# Altium PCB mainPCBV2.PcbDoc
Units mm, origin at the board's own origin, x right, y up, seen from the top; angles counter-clockwise.
Board outline 31.25 x 37.99 mm, 2 copper layers (Top Layer, Bottom Layer); 23 components, 32 nets, 129 pads, 144 vias.
Unrouted connection lines stored in the file: 6.
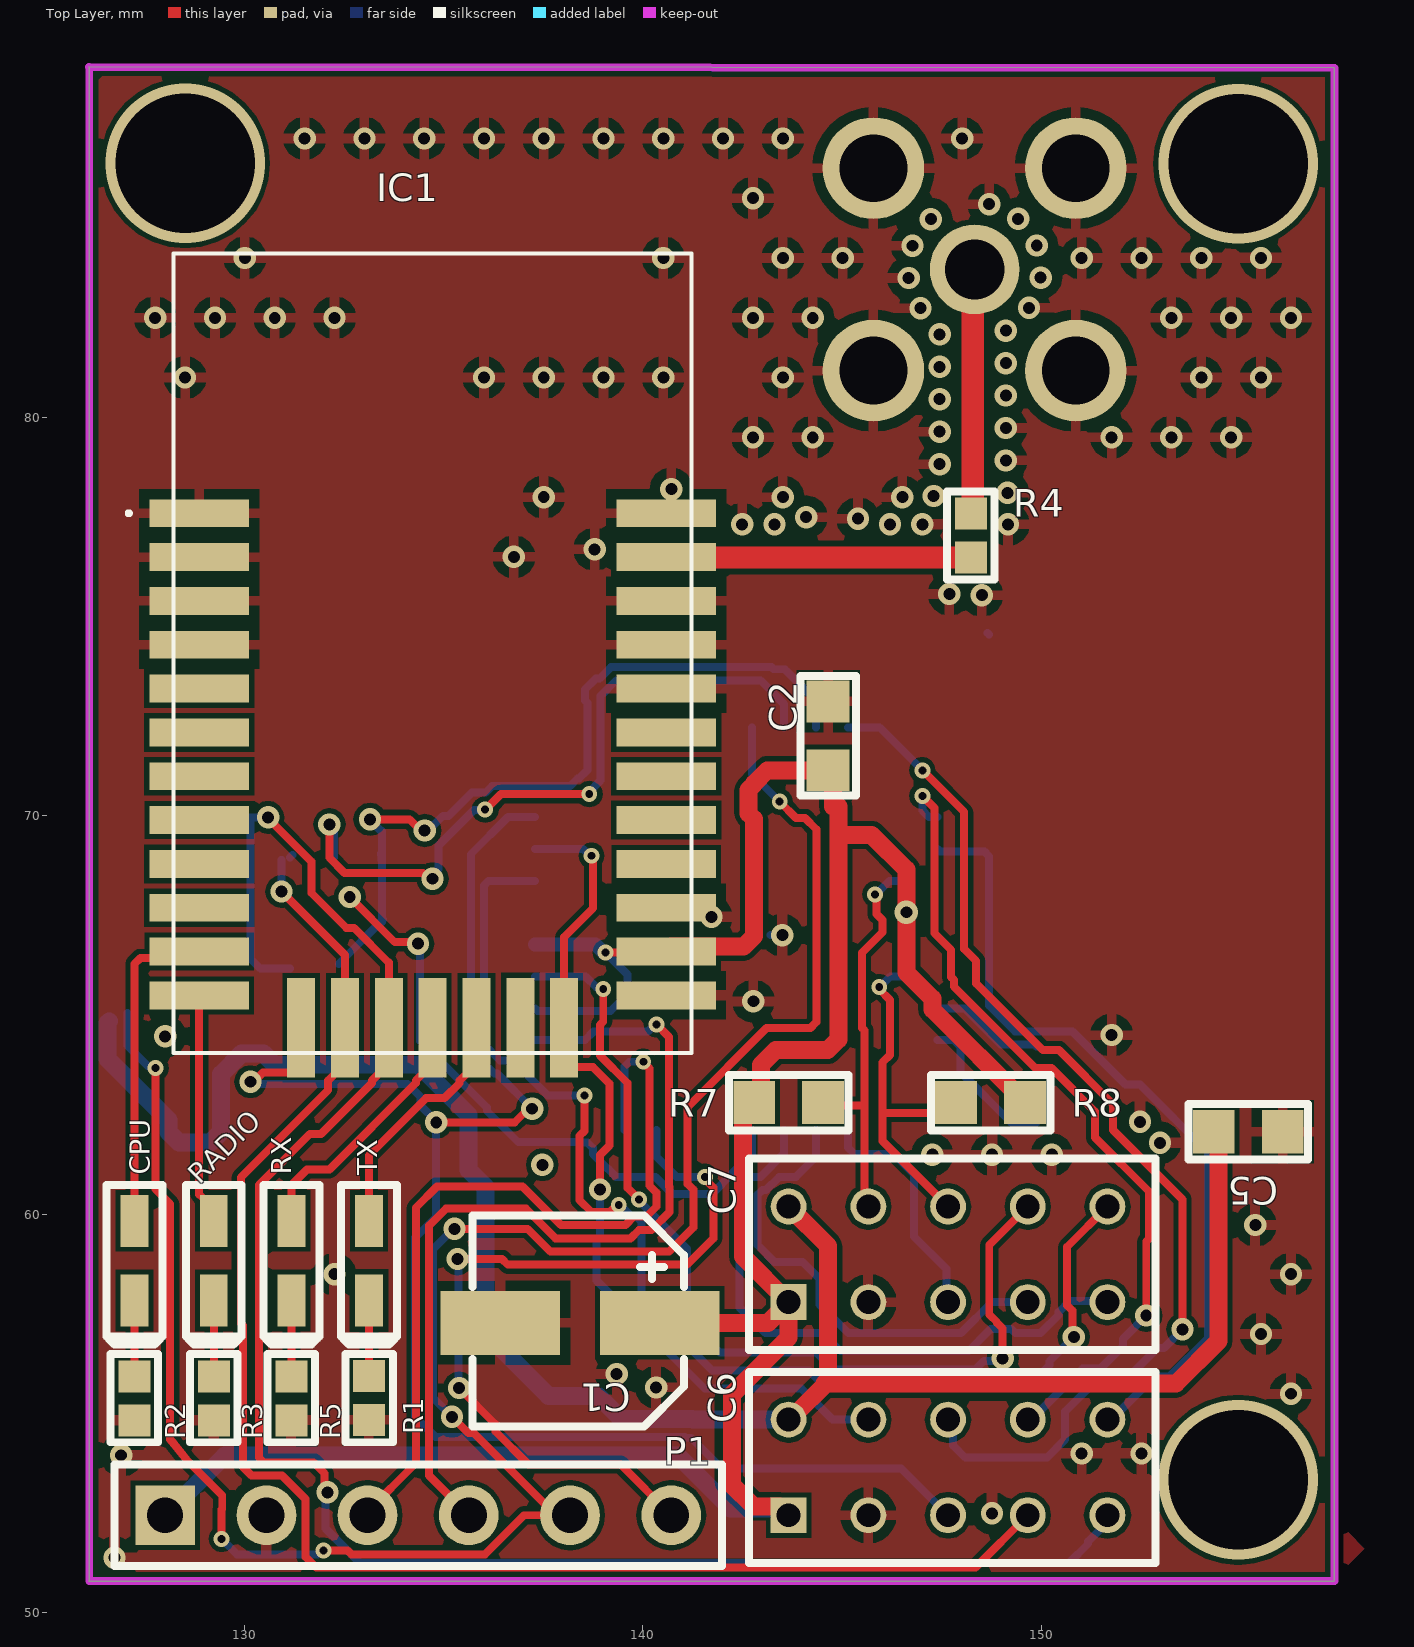
[diagram p0: Top Layer view]
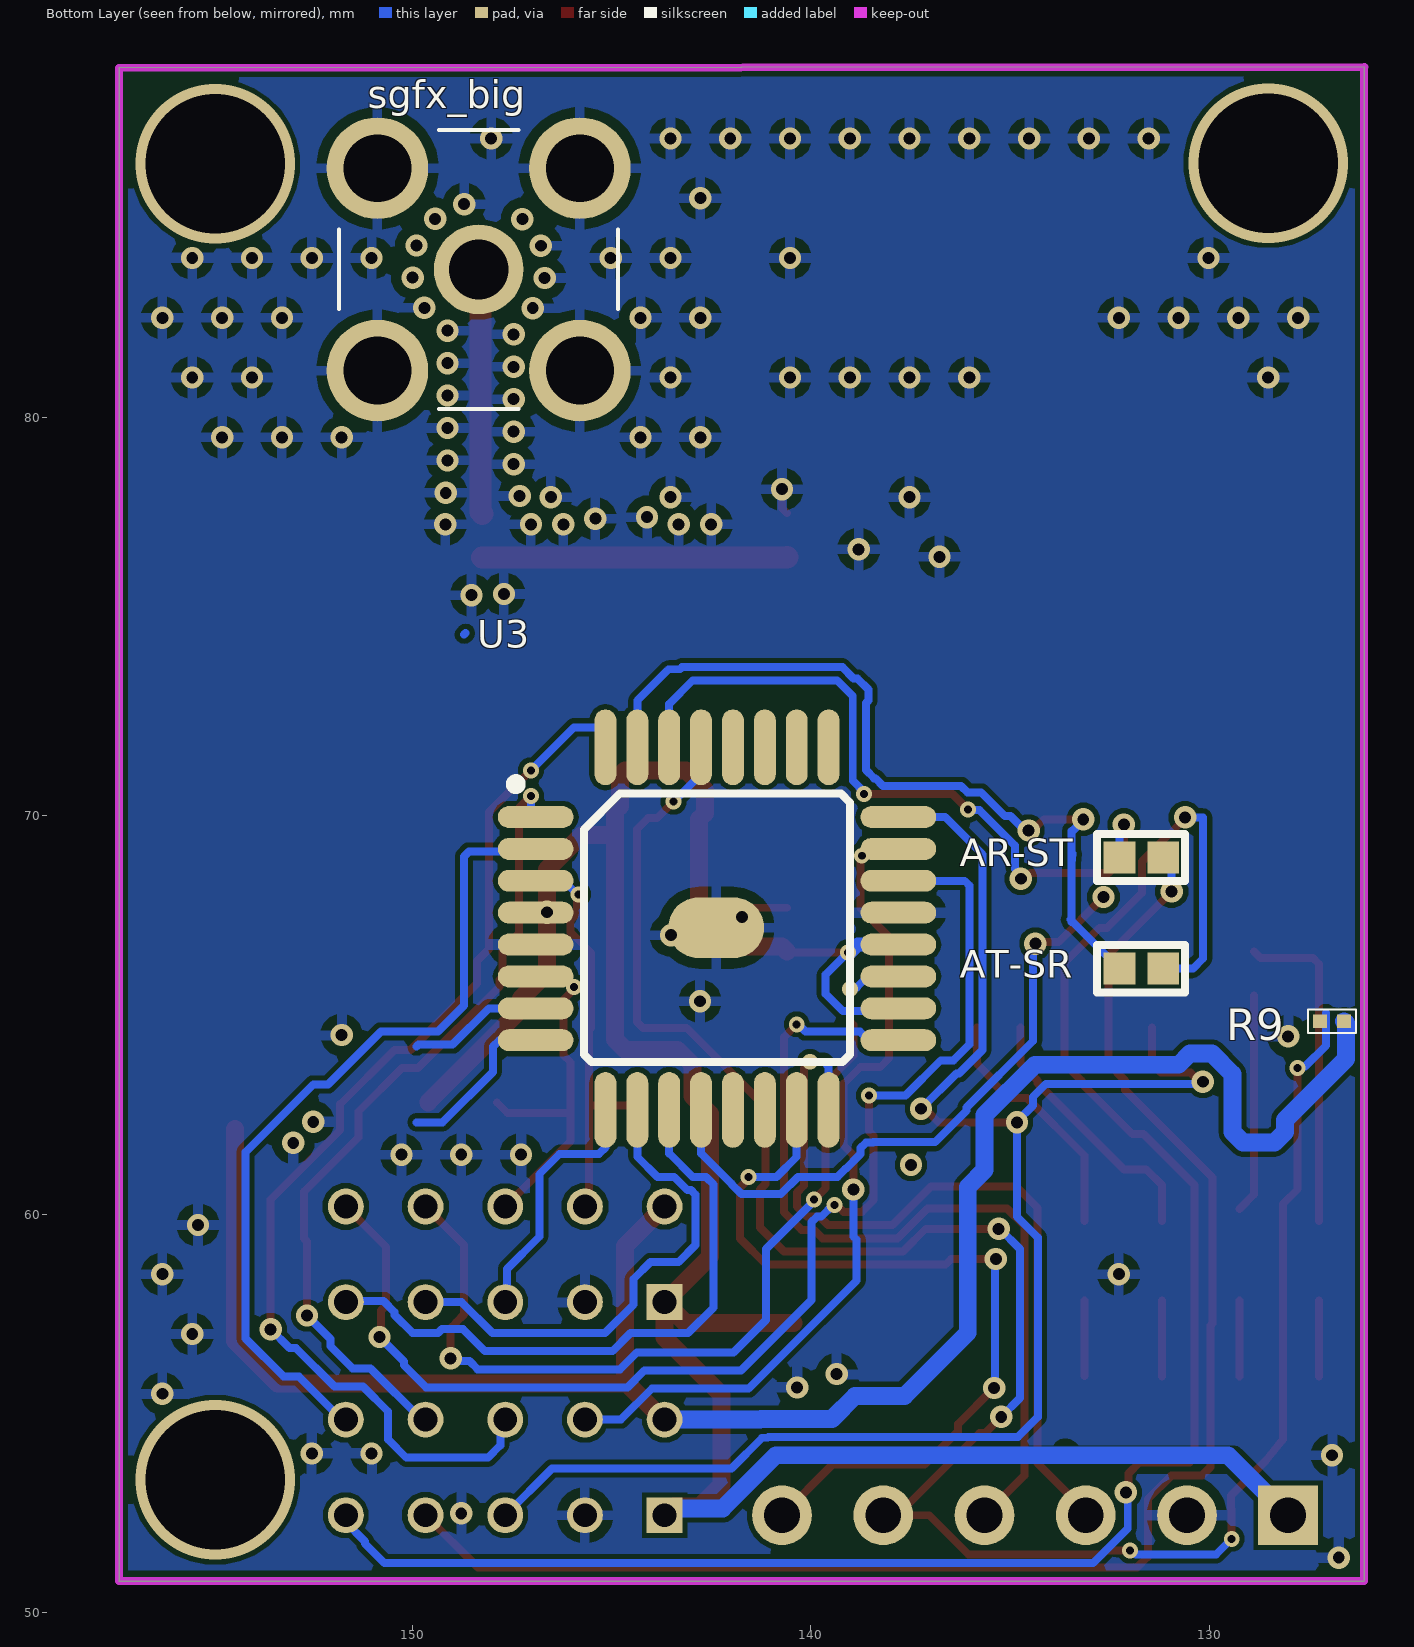
[diagram p1: Bottom Layer view, seen from below]
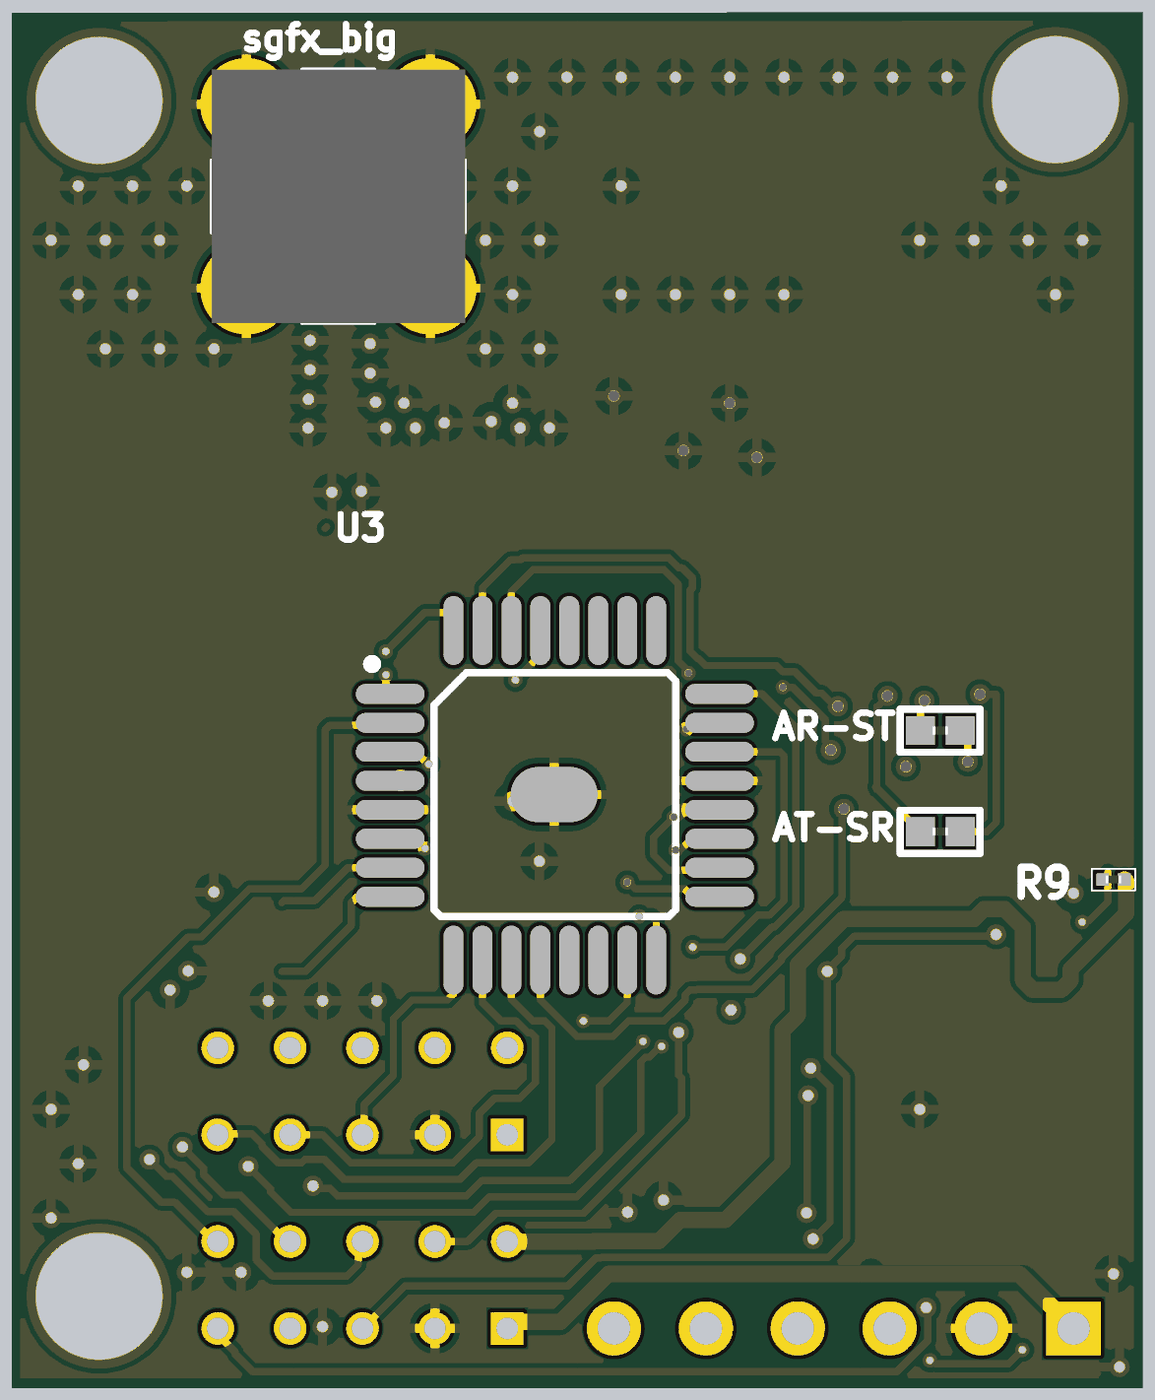
[diagram p2: 3D render of the assembled board from below, using the file's embedded part models]

## Layer stack, top to bottom
Top Solder: solder mask 0.0102, Solder Resist, Dk 3.8
Top Layer: signal copper 0.0356
Dielectric 1: dielectric 0.32, FR-4, Dk 4.5
Bottom Layer: signal copper 0.0356
Bottom Solder: solder mask 0.0102, Solder Resist, Dk 3.8

## Board outline
126.111,50.8 126.111,88.773 126.104,88.794 157.353,88.773 157.353,50.8

## Design rules (kind name [scope] priority, off if disabled: settings)
Clearance Clearance_1 [OnMid vs OnMid] p1: gap=0.13 ignorepadtopadclearanceinfootprint=TRUE
Clearance Clearance_2 [(ExistsOnLayer('Top Layer') Or ExistsOnLayer('Bottom Layer')) vs (ExistsOnLayer('Top Layer') Or ExistsOnLayer('Bottom Layer'))] p2: gap=0.13 ignorepadtopadclearanceinfootprint=TRUE
Clearance [All] p3: gap=0.13 ignorepadtopadclearanceinfootprint=TRUE
MinimumAnnularRing [All] p1: minimumring=0.13
PolygonConnect [All] p1: connectstyle=Relief reliefconductorwidth=0.254 reliefentries=4 polygonreliefangle="90 Angle" airgapwidth=0.254
RoutingVias [All] p1: holewidth=0.711 width=1.27 viastyle="Through Hole" minholewidth=0.711 minwidth=1.27 maxholewidth=0.711 maxwidth=1.27
SolderMaskExpansion SolderMaskExpansion_1 [IsVia] p1: expansion=0.102 istentingtop=TRUE
SolderMaskExpansion [All] p2: expansion=0.102 istentingtop=FALSE
SupplyNets "Schematic Supply Nets_2" [InNet('3v3')] p1: voltage=0.000
SupplyNets "Schematic Supply Nets_1" [InNet('GND')] p2: voltage=0.000
Width [All] p1: maxlimit=0.254 minlimit=0.254 preferedwidth=0.254
30 further rules are at their usual default settings.

## Components (designator, comment, footprint, x,y, rotation, side; value= is the part's Value field where it differs from the comment)
AR-ST "Res" RES_SMD_0402#1 131.699,68.961 r0 bottom value=0
AT-SR "Res" RES_SMD_0402#1 131.699,66.167 r0 bottom value=0
C1 "Cap" "Capacitor E SMT" 138.43,57.277 r0 top value=10uF
C2 "CAP_SMT_0603" SMT_CAP_0603 144.653,72.009 r90 top
C5 "CAP_SMT_0603" SMT_CAP_0603 155.194,62.074 r0 top
C6 "2mmHeader" 2MMHEADER5X2 143.662,52.451 r90 top
C7 "2mmHeader" 2MMHEADER5X2 143.662,57.798 r90 top
CPU "LED" Led0805 127.247,58.838 r270 top
IC1 "WSSFM10R1AT" WSSFM10R1AT 134.504,71.545 r0 top
P1 "Header 6" HDR1X6 128.016,52.451 r0 top
R1 "Res" RES_SMD_0402#1 133.128,55.393 r270 top value=330
R2 "Res" RES_SMD_0402#1 127.247,55.383 r90 top value=330
R3 "Res" RES_SMD_0402#1 129.24,55.383 r90 top value=330
R4 "Res" RES_SMD_0402#1 148.235,77.035 r90 top value=0
R5 "Res" RES_SMD_0402#1 131.184,55.383 r90 top value=330
R7 "Res" SMT_CAP_0603 143.662,62.804 r0 top value=1k
R8 "Res" SMT_CAP_0603 148.729,62.804 r180 top value=1k
R9 "Res" RES_SMD_0402#2 126.913,64.847 r0 bottom value=10k
RADIO "LED" Led0805 129.236,58.838 r270 top
RX "LED" Led0805 131.184,58.838 r270 top
sgfx_big "132134" 132134 148.329,83.714 r180 bottom
TX "LED" Led0805 133.131,58.838 r270 top
U3 "ATMEGA328PB-MU" ATMEGA328TQFP 142.347,67.172 r180 bottom

## Footprints (in the part's own frame and the unit in brackets; to place one, negate y for a bottom-side part, rotate by r counter-clockwise, add the part's x,y. Pads: shape width x height; smd on the part's side, far side on the other; paste and mask are expansions set on the pad)
2MMHEADER5X2 [mm]
  rect 0.9x0.9 hole 0.6: 1(0,0)
  round 0.9 hole 0.6: 2(2.4,0) 3(0,-2) 4(2.4,-2) 5(0,-4) 6(2.4,-4) 7(0,-6) 8(2.4,-6) 9(0,-8) 10(2.4,-8)
  silkscreen extent -1.2,-9.2 3.6,1
132134 [mm]
  round 2.25 hole 1.5: 1(0,0)
  round 2.55 hole 1.7: 2(2.54,2.54) 3(2.54,-2.54) 4(-2.54,-2.54) 5(-2.54,2.54)
  silkscreen extent -3.5,-3.5 3.5,3.5, body extent -3.5,-3.5 3.5,3.5, height 9.53
ATMEGA328TQFP [mm] "TQFP, 32-Leads, Body 11.15x11.15mm, Pitch 0.80mm, IPC Medium Density"
  oval 1.9x0.55 smd: 1(-4.55,2.8) 2(-4.55,2) 3(-4.55,1.2) 4(-4.55,0.4) 5(-4.55,-0.4) 6(-4.55,-1.2) 7(-4.55,-2) 8(-4.55,-2.8) 17(4.55,-2.8) 18(4.55,-2) 19(4.55,-1.2) 20(4.55,-0.4) 21(4.55,0.4) 22(4.55,1.2) 23(4.55,2) 24(4.55,2.8)
  oval 0.55x1.9 smd: 9(-2.8,-4.55) 10(-2,-4.55) 11(-1.2,-4.55) 12(-0.4,-4.55) 13(0.4,-4.55) 14(1.2,-4.55) 15(2,-4.55) 16(2.8,-4.55) 25(2.8,4.55) 26(2,4.55) 27(1.2,4.55) 28(0.4,4.55) 29(-0.4,4.55) 30(-1.2,4.55) 31(-2,4.55) 32(-2.8,4.55)
  oval 2.4x1.524 smd: 33(-0.02,0.02)
  silkscreen extent -5.18,-3.35 3.34,3.75, body extent -3.5,-3.5 3.5,3.5, height 1.2
"Capacitor E SMT" [mm]
  rect 3x1.6 smd: 1(-2,0) 2(2,0)
  silkscreen extent -2.7,-2.6 2.6,2.7
HDR1X6 [mm] "Connector; Header; 6 Position"
  rect 1.5x1.5 hole 0.9: 1(0,0)
  round 1.5 hole 0.9: 2(2.54,0) 3(5.08,0) 4(7.62,0) 5(10.16,0) 6(12.7,0)
  silkscreen extent -1.27,-1.27 13.97,1.27
Led0805 [mm]
  rect 1.3x0.7 smd: 1(-1,0) 2(1,0)
  silkscreen extent -1.9,-0.7 2.1,0.7
RES_SMD_0402#1 [mm]
  rect 0.8x0.8 smd: 1(-0.55,0) 2(0.55,0)
  silkscreen extent -1.1,-0.59 1.11,0.6, body extent -0.21,-0.11 0.21,0.11, height 0.13
RES_SMD_0402#2 [mm] "Chip Resistor, 2-Leads, Body 0.40x0.20mm, IPC Low Density"
  rect 0.35x0.35 smd: 1(-0.3,0) 2(0.3,0)
  silkscreen extent -0.6,-0.3 0.6,0.3, body extent -0.21,-0.11 0.21,0.11, height 0.13
SMT_CAP_0603 [mm]
  rect 1.05x1.08 smd: 1(-0.865,0) 2(0.865,0)
  silkscreen extent -1.5,-0.7 1.5,0.7
WSSFM10R1AT [mm]
  rect 2.5x0.7 smd: 1(-5.635,6.05) 2(-5.635,4.95) 3(-5.635,3.85) 4(-5.635,2.75) 5(-5.635,1.65) 6(-5.635,0.55) 7(-5.635,-0.55) 8(-5.635,-1.65) 9(-5.635,-2.75) 10(-5.635,-3.85) 11(-5.635,-4.95) 12(-5.635,-6.05) 20(6.085,-6.05) 21(6.085,-4.95) 22(6.085,-3.85) 23(6.085,-2.75) 24(6.085,-1.65) 25(6.085,-0.55) 26(6.085,0.55) 27(6.085,1.65) 28(6.085,2.75) 29(6.085,3.85) 30(6.085,4.95) 31(6.085,6.05)
  rect 0.7x2.5 smd: 13(-3.075,-6.86) 14(-1.975,-6.86) 15(-0.875,-6.86) 16(0.225,-6.86) 17(1.325,-6.86) 18(2.425,-6.86) 19(3.525,-6.86)
  silkscreen extent -7.45,-7.5 6.73,12.57, body extent -6.27,-7.5 6.73,7.5, height 2.1

## Part data
AR-ST AT-SR R7 R8: library part RES_SMD, "Resistor", Manufacturer="Generic Components", Class I=Passive, Class II=Resistor, Published=8-Jun-2000, Publisher="Altium Limited", Revision="July-2002: Re-released for DXP Platform."
C1: library part "Cap E SMT", "Capacitor Electrolitico", Manufacturer="Generic Components", Class I=Passive, Class II=Capacitor, Published=23-Sep-2002, Publisher="Altium Limited"
CPU RADIO RX TX: Manufacturer="Generic Components", Class I=Optoelectronic, Class II=LED, Published=8-Jun-2000, Publisher="Altium Limited", Revision="July-2002: Re-released for DXP Platform."
IC1: "Integrated Circuit", Manufacturer_Name=Wisol, Datasheet Link=http://www.erikrasmussen.dk/wisol_wssfm10r1at.pdf, Height=2mm, Manufacturer_Part_Number=WSSFM10R1AT
P1: "Header, 6-Pin", LatestRevisionDate=17-Jul-2002, LatestRevisionNote="Re-released for DXP Platform.", Publisher="Altium Limited"
R1 R2 R3 R4 R5 R9: library part RES_SMT_1206, "Resistor", Manufacturer="Generic Components", Class I=Passive, Class II=Resistor, Published=8-Jun-2000, Publisher="Altium Limited", Revision="July-2002: Re-released for DXP Platform."
sgfx_big: "Connector", Manufacturer_Name="Amphenol RF", Mouser Part Number=523-132134, Allied_Number=70031837, Allied Price/Stock=https://www.alliedelec.com/amphenolrf-132134/70031837/, Datasheet Link=https://www.amphenolrf.com/downloads/dl/file/id/2187/product/2843/132134_customer_drawing.pdf, Height=9.53mm, Manufacturer_Part_Number=132134, Mouser Price/Stock=https://www.mouser.com/Search/Refine.aspx?Keyword=523-132134
U3: "AVR 32KBytes Flash, 1KBytes EEPROM, 2KBytes RAM, w - 20MHZ, QFN/MFL, IND TEMP, GREEN 5 V/ DFN/QFN _M_", Package="VFQFN-32 Microchip", Digi-Key_Part_Number=ATMEGA328PB-MU-ND, Digi-Key_Purchase_URL=https://www.digikey.com/product-detail/en/microchip-technology/ATMEGA328PB-MU/ATMEGA328PB-MU-ND/5638814?utm_source=snapeda&utm_medium=aggregator&utm_campaign=symbol, MF=Microchip, MP=ATMEGA328PB-MU, SnapEDA_Link=https://www.snapeda.com/parts/ATMEGA328PB-MU/Microchip/view-part/?ref=snap

## Via types
v1: diameter 0.56, hole 0.3, Top Layer to Bottom Layer, tented both sides, 121 vias
v2: diameter 0.4, hole 0.2, Top Layer to Bottom Layer, tented both sides, 19 vias
v3: diameter 4, hole 3.5, Top Layer to Bottom Layer, tented both sides, 3 vias
v4: diameter 0.6, hole 0.3, Top Layer to Bottom Layer, tented both sides, 1 vias

## Nets (pads, with @x,y where several pads share a name; then routed paths per layer and width w, separated by ;. In a path a pad name is that pad's centre, name@x,y a point inside that pad or via, vN(x,y) a via of type N, cw(c..) or ccw(c..) an arc to the next point about the centre after c; other vN are vias at no path point)
3v3: C1.2 C2.1 C5.1 C6.1 C6.2 C7.1 C7.2 IC1.21 P1.1 R7.1 R8.1 R9.1 U3.4 U3.18 U3.20 | length 117
  Top Layer w0.2: v2(139.065,66.572) 140.566,66.572 IC1.21
  Top Layer w0.45: C1.2 143.141,57.277 C7.1 ; IC1.21 140.714,66.72 142.533,66.72 142.797,66.984 142.797,69.918 142.65,70.065 142.65,70.649 142.797,70.796 142.797,70.817 143.124,71.144 C2.1 144.777,71.02 144.777,70.234 ; C6.1 143.437,52.676 142.777,52.676 142.24,53.213 142.24,55.485 143.662,56.906 C7.1 ; C7.2 144.653,59.207 144.653,55.842 144.564,55.753 153.377,55.753 154.446,56.823 C5.1@154.446,62.139 ; C6.2@143.764,54.922 144.666,55.824 ; 144.907,70.231 144.907,69.551 ; R8.1 149.594,62.819 147.266,65.147 147.266,65.419 146.613,66.072 v4(146.613,67.582) 146.613,68.651 145.742,69.523 144.935,69.523 144.907,69.551 ; C7.1 142.519,58.941 142.519,62.526 142.966,62.974 142.966,63.754 143.337,64.125 144.643,64.125 144.907,64.389 144.907,69.551
  Bottom Layer w0.2: U3.18@137.297,65.172 137.364,65.105 138.535,65.105 138.54,65.1 139.187,65.1 139.619,65.532 139.619,66.017 v2(139.065,66.572) v2@139.011,66.572
  Bottom Layer w0.35: U3.20@137.297,66.772 138.81,66.772 v2@139.011,66.572
  Bottom Layer w0.45: R9.1 126.566,64.8 126.566,63.903 128.096,62.373 128.096,62.065 128.36,61.801 129.149,61.801 129.413,62.065 129.413,63.518 129.929,64.034 130.483,64.034 130.762,63.756 134.372,63.756 135.633,62.495 135.633,61.111 136.055,60.689 136.055,57.031 137.638,55.448 138.879,55.448 139.46,54.867 141.249,54.867 141.265,54.851 C6.2 ; P1.1 129.522,53.957 140.872,53.957 142.204,52.625 143.487,52.625 C6.1
ADC6: C7.8 U3.19 | length 24
  Top Layer w0.2: v2(139.009,65.661) 139.009,64.839 138.926,64.756 138.926,63.988 139.621,63.292 139.621,60.663 v2(139.911,60.373) ; v1(149.032,56.388) 149.032,57.139 148.893,57.279 148.893,57.291 148.695,57.49 148.695,59.231 C7.8
  Bottom Layer w0.2: U3.19@137.297,65.972 138.567,65.972 138.84,65.699 138.971,65.699 v2(139.009,65.661) ; v2(139.911,60.373) 139.911,60.339 141.117,59.132 141.117,57.353 141.934,56.536 144.359,56.536 144.782,56.113 148.352,56.113 148.559,56.319 148.964,56.319 v1(149.032,56.388)
ADC7: C7.10 U3.22 | length 31.1
  Top Layer w0.2: v2(138.538,62.982) 138.538,62.095 138.416,61.973 138.416,60.356 138.708,60.064 139.17,60.064 139.358,60.253 v2@139.358,60.278 ; v1(150.818,56.926) 150.779,56.965 150.779,57.587 150.652,57.714 150.652,59.188 C7.10
  Bottom Layer w0.2: U3.22@137.297,68.372 136.133,68.372 136.016,68.255 136.016,64.265 136.413,63.867 136.732,63.867 137.618,62.982 v2(138.538,62.982) ; v2(139.398,60.238) 139.437,60.238 139.732,59.943 139.839,59.943 139.974,59.808 ; 139.927,59.856 139.974,59.808 ; v1(150.818,56.926) 150.202,56.31 150.202,56.216 149.645,55.659 144.594,55.659 144.171,56.082 141.746,56.082 139.974,57.854 139.974,59.808
D2: C6.6 U3.32 | length 27.6
  Top Layer w0.2: v2(147.017,71.144) 148.066,70.095 148.066,66.662 148.367,66.361 148.367,65.797 150.039,64.125 150.443,64.125 151.802,62.765 151.802,62.117 153.547,60.373 v1(153.547,57.117)
  Bottom Layer w0.2: U3.32@145.147,72.222 145.938,72.222 v2(147.017,71.144) ; C6.6 147.785,54.727 147.785,54.206 148.095,53.896 150.144,53.896 150.599,54.351 150.599,55.05 151.228,55.68 151.948,55.68 152.917,56.648 153.079,56.648 v1(153.547,57.117)
D3: C6.8 U3.1 | length 20.6
  Top Layer w0.2: v2(147.017,70.5) 147.318,70.198 147.318,67.058 147.736,66.64 147.736,65.959 147.808,65.887 147.808,65.714 149.851,63.671 150.255,63.671 151.348,62.577 151.348,61.929 152.708,60.57 152.708,59.396 152.635,59.323 v1(152.635,57.462)
  Bottom Layer w0.2: v2(147.017,70.5) 147.017,70.134 147.178,69.972 U3.1@147.397,69.972 ; C6.8 149.757,54.851 151.04,56.134 151.49,56.134 152.048,56.693 152.048,56.875 v1(152.635,57.462)
D4: C6.10 U3.2 | length 20.2
  Bottom Layer w0.2: U3.2@147.397,69.172 147.464,69.105 148.573,69.105 148.693,68.985 148.693,65.245 149.347,64.591 150.782,64.591 152.112,63.261 152.478,63.261 154.178,61.561 154.178,56.89 153.221,55.932 152.843,55.932 151.761,54.851 C6.10
D5: C7.5 U3.9 | length 5.9
  Bottom Layer w0.2: U3.9@145.147,62.122 145.147,61.682 145.309,61.52 146.295,61.52 146.807,61.007 146.807,59.441 147.619,58.629 147.619,57.841 C7.5
D6: C7.7 U3.10 | length 12.2
  Bottom Layer w0.2: U3.10@144.347,62.122 144.347,61.447 143.842,60.942 143.423,60.942 143.093,60.612 143.002,60.612 142.885,60.495 142.885,59.234 143.31,58.809 144.013,58.809 144.439,58.383 144.439,57.741 145.159,57.021 147.983,57.021 148.76,57.798 C7.7
D7: C7.9 U3.11 | length 15.5
  Bottom Layer w0.2: U3.11@143.547,62.122 143.547,61.533 142.956,60.942 142.623,60.942 142.431,60.75 142.431,57.667 143.076,57.021 144.517,57.021 144.971,56.567 148.171,56.567 148.727,57.122 149.248,57.122 149.349,57.021 149.983,57.021 150.439,57.476 150.439,57.548 150.716,57.825 151.634,57.825 C7.9
deepSLP: C6.5 IC1.13 U3.24 | length 41.2
  Top Layer w0.2: v1(130.156,63.329) 130.239,63.329 130.471,63.562 131.206,63.562 131.429,63.785 IC1.13 ; v1(134.818,62.311) 136.788,62.311 137.129,62.652 v1(137.226,62.652)
  Bottom Layer w0.2: v1(130.156,63.329) 130.208,63.278 134.094,63.278 134.421,62.95 134.421,62.735 134.818,62.338 v1(134.818,62.311) 134.818,59.944 134.289,59.415 134.289,54.921 134.798,54.412 141.06,54.412 141.076,54.396 141.213,54.396 141.983,53.626 146.487,53.626 C6.5 ; v1(137.226,62.652) 136.341,63.537 136.276,63.537 135.686,64.128 135.686,69.036 136.622,69.972 U3.24@137.297,69.972
GND: C1.1 C2.2 C5.2 C6.3 C7.3 IC1.1 IC1.2 IC1.3 IC1.4 IC1.20 IC1.22 IC1.27 IC1.28 IC1.29 IC1.31 P1.2 R1.2 R2.1 R3.1 R5.1 sgfx_big.2 sgfx_big.3 sgfx_big.4 sgfx_big.5 U3.5 U3.21 U3.33 | length 2.2
  Top Layer w0.2: IC1.22 141.496,67.695 v1(141.723,67.468) ; IC1.31 140.716,77.722 v1(140.716,78.199)
  Bottom Layer w0.2: U3.33@143.207,67.007 v1(143.502,67.007)
  other v1: 126.746,51.387 148.766,52.5 126.913,53.957 151.016,54 152.516,54 156.266,55.5 140.337,55.659 139.346,55.994 155.516,57 132.266,58.5 156.266,58.5 155.371,59.734 147.266,61.5 148.766,61.5 150.266,61.5 152.981,61.797 152.479,62.322 128.016,64.468 151.766,64.5 142.775,65.349 148.508,75.541 147.694,75.568 136.766,76.5 138.795,76.69 142.495,77.315 143.309,77.315 146.203,77.315 147.017,77.315 149.166,77.315 145.401,77.458 144.102,77.497 137.516,78 143.516,78 146.516,78 147.299,78.029 149.155,78.107 147.451,78.828 149.112,78.92 142.766,79.5 144.266,79.5 151.766,79.5 153.266,79.5 154.766,79.5 147.451,79.642 149.112,79.734 147.451,80.456 149.112,80.548 128.516,81 136.016,81 137.516,81 139.016,81 140.516,81 143.516,81 154.016,81 155.516,81 147.451,81.27 149.112,81.362 147.451,82.084 149.112,82.176 127.766,82.5 129.266,82.5 130.766,82.5 132.266,82.5 142.766,82.5 144.266,82.5 153.266,82.5 154.766,82.5 156.266,82.5 146.971,82.741 149.691,82.748 146.673,83.499 149.985,83.507 130.016,84 140.516,84 143.516,84 145.016,84 151.016,84 152.516,84 154.016,84 155.516,84 146.767,84.307 149.887,84.315 147.231,84.976 149.419,84.981 148.693,85.35 142.766,85.5 131.516,87 133.016,87 134.516,87 136.016,87 137.516,87 139.016,87 140.516,87 142.016,87 143.516,87 148.016,87
MISO: P1.3 U3.16 | length 20.9
  Top Layer w0.2: P1.3 133.096,52.547 134.306,53.757 134.306,60.167 134.839,60.7 136.981,60.7 137.946,59.734 139.565,59.734 139.774,59.943 140.089,59.943 140.341,60.195 140.341,60.551 140.17,60.721 140.17,63.663 140.013,63.82 v2(140.013,63.831)
  Bottom Layer w0.2: U3.16@139.547,62.122 139.547,63.714 139.664,63.831 v2(140.013,63.831)
MOSI: P1.6 U3.15 | length 20.5
  Top Layer w0.2: v1(135.35,58.881) 136.471,58.881 136.614,58.738 141.113,58.738 141.77,59.395 141.77,60.676 141.558,60.888 v2(141.558,60.942) ; v1(135.394,55.643) 136.3,54.737 136.3,54.558 137.137,53.721 139.446,53.721 P1.6
  Bottom Layer w0.2: v1(135.35,58.881) 135.372,58.859 135.372,55.665 v1(135.394,55.643) ; U3.15@140.347,62.122 140.347,61.447 140.852,60.942 v2(141.558,60.942)
NetCPU_1: CPU.1 IC1.11 | length 8.2
  Top Layer w0.2: CPU.1 127.247,66.289 127.395,66.438 128.712,66.438 IC1.11
NetCPU_2: CPU.2 R2.2 | length 1.9
  Top Layer w0.2: R2.2 CPU.2
NetIC1_12: IC1.12 RADIO.1 | length 5.5
  Top Layer w0.2: IC1.12 128.869,60.505 RADIO.1@129.236,60.138
NetIC1_16: IC1.16 RX.1 | length 6.6
  Top Layer w0.2: RX.1 131.184,60.736 131.578,61.13 132.137,61.13 134.306,63.3 134.306,63.362 134.729,63.785 IC1.16
NetIC1_17: IC1.17 TX.1 | length 6.2
  Top Layer w0.2: TX.1 133.131,61.482 134.566,62.918 135.024,62.918 135.406,63.3 135.406,63.362 135.829,63.785 IC1.17
NetIC1_30: IC1.30 R4.1 | length 7.6
  Top Layer w0.561: IC1.30 140.599,76.485 144.653,76.485 146.019,76.485 R4.1
NetR1_1: R1.1 TX.2 | length 1.9
  Top Layer w0.2: R1.1 133.131,55.946 TX.2
NetR3_2: R3.2 RADIO.2 | length 1.9
  Top Layer w0.2: RADIO.2 129.236,55.936 R3.2
NetR4_2: R4.2 sgfx_big.1 | length 6.2
  Top Layer w0.561: R4.2 148.282,77.632 148.282,83.667 sgfx_big.1
NetR5_2: R5.2 RX.2 | length 1.9
  Top Layer w0.2: R5.2 RX.2
RESET: P1.5 R9.2 U3.29 | length 54.3
  Top Layer w0.2: v2(127.777,63.671) 127.777,60.633 128.143,60.267 128.143,54.44 128.143,54.358 128.57,53.827 129.448,52.948 129.448,52.611 129.433,52.595 129.433,51.861 v2(129.431,51.86) ; v2(131.985,51.568) 132.593,51.568 132.69,51.471 136.042,51.471 137.022,52.451 P1.5@137.826,52.451 ; v1(135.215,54.922) 135.625,54.511 135.766,54.511 P1.5@137.826,52.451 ; v1(135.278,59.639) 137.108,59.639 137.68,59.068 140.665,59.068 141.27,59.673 141.27,60.623 141.128,60.764 141.128,62.696 143.109,64.677 144.206,64.677 144.355,64.826 144.355,69.665 144.073,69.946 143.848,69.946 v2(143.438,70.357) ; P1.5 P1.5@137.826,52.451
  Bottom Layer w0.2: 127.068,65.054 127.068,64.233 127.592,63.709 127.738,63.709 v2(127.777,63.671) ; v2(129.431,51.86) 129.82,51.471 131.834,51.471 131.931,51.568 v2(131.985,51.568) ; v1(135.215,54.922) 134.743,55.393 134.743,59.132 135.25,59.639 v1(135.278,59.639) ; U3.29@142.747,72.222 142.747,71.048 v2(143.438,70.357)
Rst: C6.4 IC1.19 U3.23 | length 21.6
  Top Layer w0.2: v2(138.715,69) 138.751,68.964 138.751,67.685 138.029,66.963 IC1.19 138.029,63.919 138.252,63.696 138.751,63.696 139.167,63.28 139.167,61.731 138.926,61.49 v1(138.926,60.625)
  Bottom Layer w0.2: U3.23@137.297,69.172 138.505,69.172 138.678,69 v2(138.715,69) ; v1(138.926,60.625) 138.926,59.448 138.843,59.365 138.843,58.343 141.558,55.628 143.983,55.628 144.76,54.851 C6.4
RXsig: AT-SR.1 C6.9 IC1.15 | length 47.9
  Top Layer w0.2: v1(130.599,69.963) 130.599,69.939 131.683,68.855 131.683,68.069 132.56,67.193 132.752,67.193 133.629,66.316 133.629,63.785 133.206,63.362 133.206,63.3 131.927,62.021 131.646,62.021 130.367,60.742 130.367,53.896 130.484,53.778 131.74,53.778 132.02,53.499 132.02,53.095 v1(132.088,53.026)
  Bottom Layer w0.2: v1(130.599,69.963) 130.156,69.963 130.156,66.417 130.406,66.167 AT-SR.1 ; v1(132.088,53.026) 132.04,52.978 132.04,52.121 132.907,51.254 150.695,51.254 151.179,51.738 151.179,51.793 151.662,52.276 C6.9
RXuC: AR-ST.2 U3.30 | length 17.9
  Top Layer w0.2: v1(132.137,69.786) 132.137,68.952 132.519,68.57 134.48,68.57 134.627,68.423 v1(134.724,68.423) ; v2(136.047,70.159) 136.052,70.159 136.441,70.548 v2(138.658,70.548)
  Bottom Layer w0.2: AR-ST.2 v1@132.249,69.786 ; v1(134.724,68.423) 134.724,68.521 134.875,68.672 134.875,69.258 135.765,70.147 v2@136.083,70.147 ; v2(138.658,70.548) 138.658,70.602 138.941,70.886 138.941,73.006 139.338,73.402 142.956,73.402 143.547,72.812 U3.30@143.547,72.222
SCK: P1.4 U3.17 | length 22.5
  Top Layer w0.2: P1.4 134.636,53.451 134.636,59.718 135.067,60.149 137.065,60.149 137.816,59.398 139.695,59.398 139.911,59.613 140.225,59.613 140.671,60.058 140.671,60.688 140.662,60.696 140.662,64.455 v2(140.347,64.77)
  Bottom Layer w0.2: U3.17@137.297,64.372 138.546,64.372 138.764,64.591 140.13,64.591 140.309,64.77 v2(140.347,64.77)
SCL: C7.6 R8.2 U3.6 | length 9.2
  Top Layer w0.2: v2(145.935,65.705) 145.935,65.651 146.205,65.38 146.205,64.003 146.019,63.817 146.019,62.55 ; C7.6 146.019,61.841 146.019,62.55 ; R8.2 147.61,62.55 146.019,62.55
  Bottom Layer w0.2: v2(145.935,65.705) 145.945,65.705 146.212,65.972 U3.6@146.683,65.972
SDA: C7.4 R7.2 U3.3 | length 10.2
  Top Layer w0.2: R7.2 144.6,62.731 145.565,62.731 ; C7.4 145.565,60.295 145.565,62.731 ; v2(145.829,68.032) 145.867,67.994 145.867,67.54 146.019,67.388 146.019,67.08 145.505,66.567 145.505,64.679 145.565,64.619 145.565,62.731
  Bottom Layer w0.2: v2(145.829,68.032) 145.855,68.032 146.195,68.372 U3.3@146.651,68.372
TXsig: AR-ST.1 C6.7 IC1.14 | length 39.2
  Top Layer w0.2: v1(130.937,68.103) 132.529,66.511 132.529,63.785 132.106,63.362 132.106,63.123 129.913,60.93 129.913,57.264 129.967,57.211 129.967,53.661 130.179,53.448 130.944,53.448 131.536,52.857 131.536,51.409 131.807,51.138 148.348,51.138 C6.7
  Bottom Layer w0.2: v1(130.937,68.103) AR-ST.1@130.937,68.9 ; AR-ST.1 AR-ST.1@131.206,69.018
TXuC: AT-SR.2 U3.31 | length 19.8
  Top Layer w0.2: v1(133.157,69.915) 134.147,69.915 134.43,69.632 v1(134.528,69.632)
  Bottom Layer w0.2: AT-SR.2@132.371,66.289 133.483,67.4 ; v1(133.157,69.915) 133.157,69.891 133.43,69.618 ; 133.43,69.055 133.453,68.795 ; 133.453,67.337 133.453,69.043 ; 133.453,69.056 133.453,69.62 ; v1(134.528,69.632) 134.619,69.632 134.983,69.996 135.125,69.996 135.718,70.589 136.058,70.589 136.223,70.754 138.18,70.754 138.369,70.943 138.404,70.943 138.611,71.15 138.611,72.832 138.547,72.896 138.547,73.171 138.828,73.452 138.92,73.452 139.201,73.732 143.229,73.732 143.277,73.685 143.565,73.674 143.608,73.636 144.347,72.897 U3.31@144.347,72.222
pads on no net: IC1.5 IC1.6 IC1.7 IC1.8 IC1.9 IC1.10 IC1.18 IC1.23 IC1.24 IC1.25 IC1.26 U3.7 U3.8 U3.12 U3.13 U3.14 U3.25 U3.26 U3.27 U3.28
copper on no net: | length 22.5
  Top Layer w0.2: v1(132.648,67.963) 133.779,66.832 134.321,66.832 v1(134.359,66.794)
  Bottom Layer w0.2: v1(132.648,67.963) v1@132.648,68.046 ; v1(134.359,66.794) 134.414,66.739 134.414,64.357 136.088,62.683 136.088,62.603 136.879,61.812 138.416,61.812 138.427,61.801 138.611,61.801 138.746,61.666 138.746,61.515 139.127,61.135 139.137,61.135 139.33,60.942 140.318,60.942 140.748,60.512 141.736,60.512 141.988,60.764 141.988,60.774 142.747,61.533 142.747,62.122 ; 147.397,64.372 147.81,64.372 147.972,64.211 147.972,63.575 149.237,62.311 149.887,62.311 ; 147.397,65.172 148.072,65.172 148.984,64.261 149.837,64.261 149.887,64.211 ; 148.655,74.587 148.693,74.549
  other v1: 137.479,61.244
  other v3: 154.94,53.34 154.94,86.36 128.517,86.381

## Polygon pours and split planes (outlines as drawn)
GND on Top Layer "Top Layer-GND" (solid, pour order 4): 126.111,88.773 126.666,88.773 157.353,88.773 157.353,52.371 158.108,51.616 157.291,50.8 126.103,50.8
GND on Bottom Layer "Bottom Layer-GND" (solid, remove dead copper, pour order 6): 157.353,88.794 157.353,51.829 158.108,51.075 126.104,51.075 126.104,88.794

## Keep-outs
Keep-Out Layer:
  lines w0.2: 126.104,88.794 157.353,88.773 157.353,50.8 126.111,50.8 126.111,88.773